# EAGLE board old_oven_pcb (EAGLE 9.4.2)
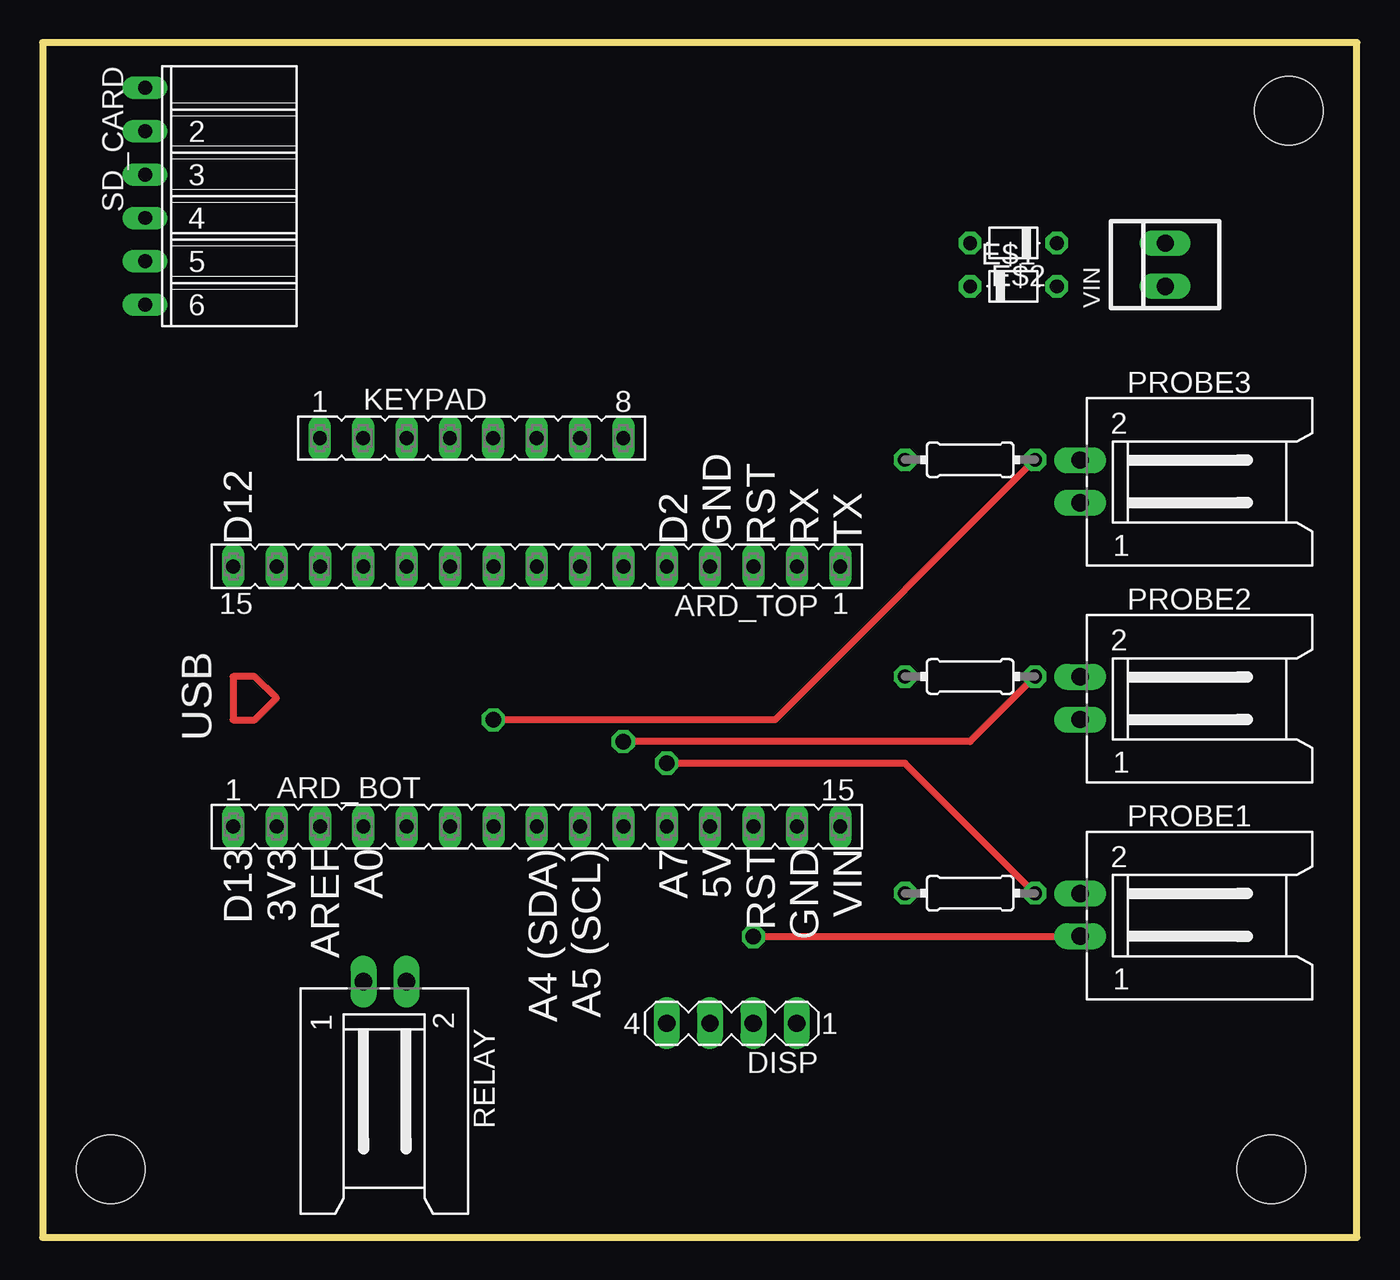
[diagram p0: board, top side]
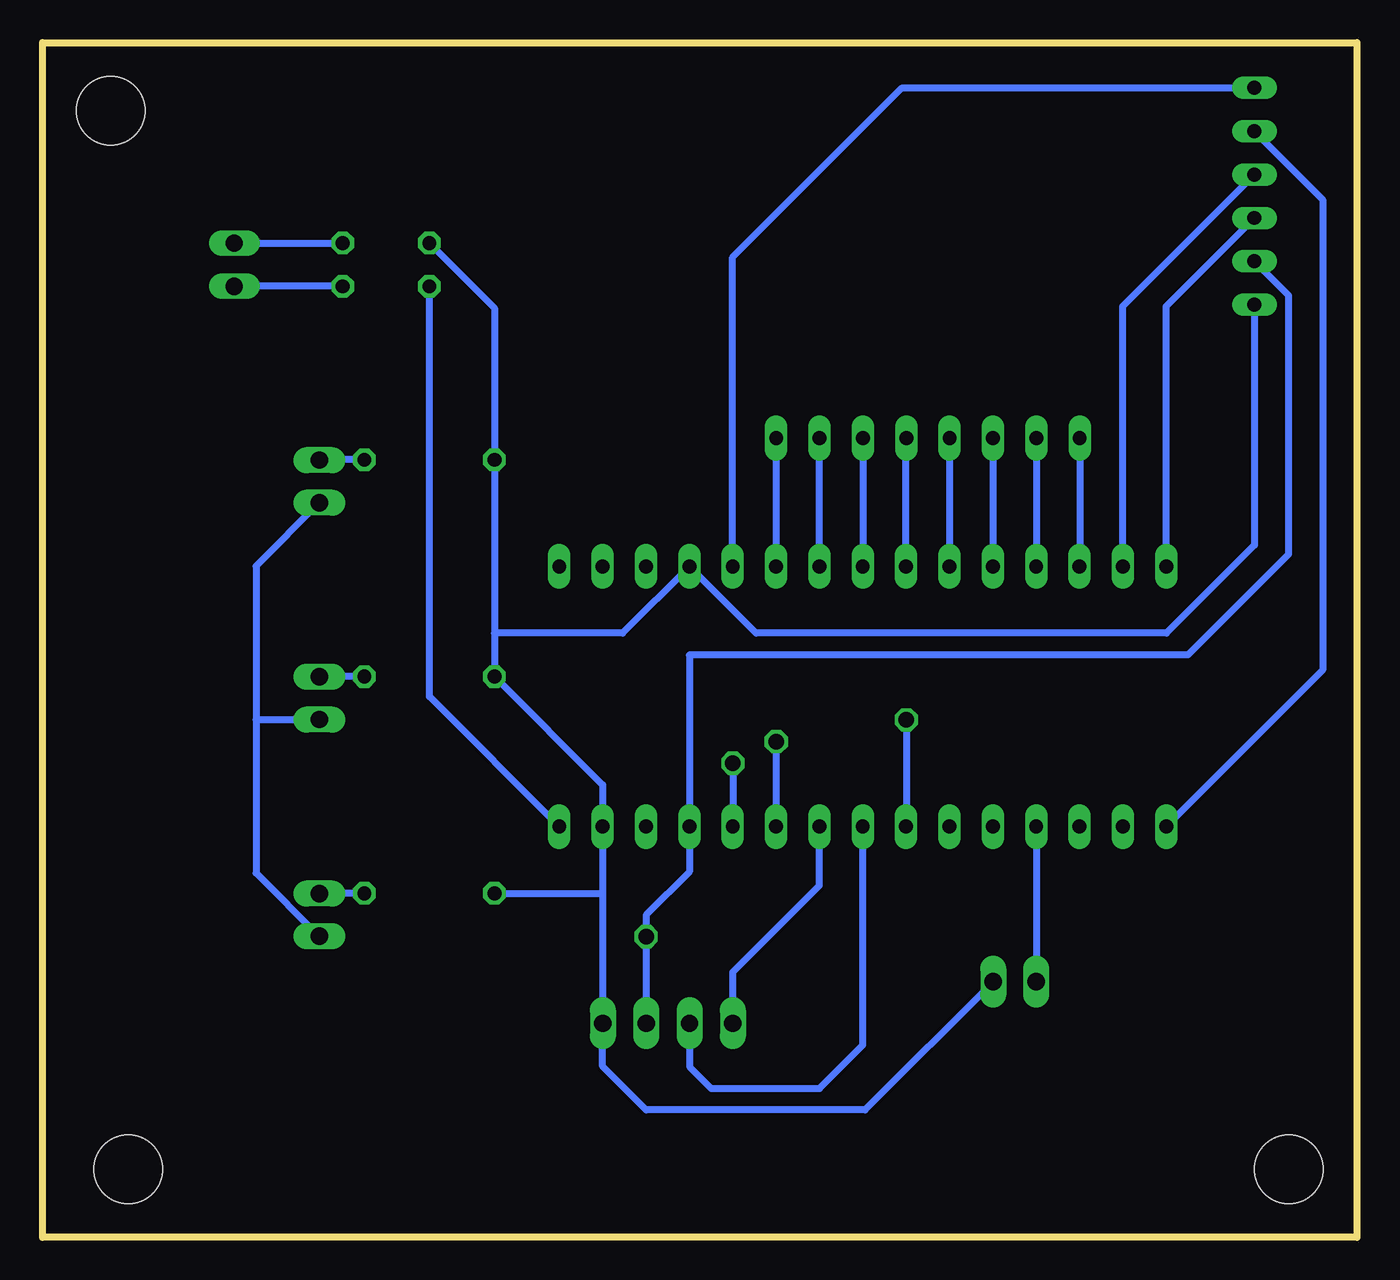
[diagram p1: board, bottom side, seen from below]

Size 77 x 70 mm. Coordinates in mm from the lower left corner, seen from the top.
Outline: 0,70 0,0 77,0 77,70 0,70
Copper layers (1*16): Top 0.035mm / dielectric 1.5mm / Bottom 0.035mm
Design rules "default": minimum track width 6mil, minimum drill 0.35mm, track to track 6mil, track to pad 6mil, pad to pad 6mil, via to via 6mil, smd to smd 6mil, copper to edge 40mil, drill to drill 6mil, minimum pad ring 10mil, minimum via ring 8mil, stop-mask expansion 4mil, vias tented up to drill 0mil, thermal gap 10mil
Holes 4 mm at 73,66 4,4 72,4

## Footprints (pad centres in the part's own frame; a part is rotated, then mirrored left to right if it is on the bottom)
FE15 = drill 0.813 long: 1 -17.78,0; 2 -15.24,0; 3 -12.7,0; 4 -10.16,0; 5 -7.62,0; 6 -5.08,0; 7 -2.54,0; 8 0,0; 9 2.54,0; 10 5.08,0; 11 7.62,0; 12 10.16,0; 13 12.7,0; 14 15.24,0; 15 17.78,0
MA04-1 = drill 1.016 long: 1 -3.81,0; 2 -1.27,0; 3 1.27,0; 4 3.81,0
D-5 = drill 0.813 octagon: A 2.54,0; C -2.54,0
0204/7 = drill 0.813 octagon: 1 -3.81,0; 2 3.81,0
FE08 = drill 0.813 long: 1 -8.89,0; 2 -6.35,0; 3 -3.81,0; 4 -1.27,0; 5 1.27,0; 6 3.81,0; 7 6.35,0; 8 8.89,0
L02P = drill 1.016 long: 1 1.25,-6.25; 2 -1.25,-6.25
FE06W = drill 0.813 long: 1 -6.35,0; 2 -3.81,0; 3 -1.27,0; 4 1.27,0; 5 3.81,0; 6 6.35,0
22-23-2021 = drill 1 long: 1 -1.27,0; 2 1.27,0

## Placement (x,y rotation side)
ARD_BOT  [FE15]  28.95,24.07 0 top
ARD_TOP  [FE15]  28.95,39.31 180 top
DISP  [MA04-1]  40.37,12.54 180 top
E$1  [D-5]  56.88,55.72 0 top
E$2  [D-5]  56.88,58.26 180 top
E$3  10k  [0204/7]  54.34,32.86 180 top
E$4  10k  [0204/7]  54.34,20.16 180 top
E$6  10k  [0204/7]  54.34,45.56 180 top
KEYPAD  [FE08]  25.13,46.83 0 top
PROBE1  [L02P]  67.04,18.89 270 top
PROBE2  [L02P]  67.04,31.59 270 top
PROBE3  [L02P]  67.04,44.29 270 top
RELAY  [L02P]  20.05,8.73 180 top
SD_CARD  [FE06W]  6,61 270 top
VIN  [22-23-2021]  65.77,56.99 90 top

## Library data of the parts
ARD_BOT ARD_TOP = con-lsta; OC_FARNELL: unknown; OC_NEWARK: unknown
DISP = con-lstb
E$1 E$2 = ref-packages
E$3 E$4 E$6 = rcl
KEYPAD SD_CARD = con-lsta
PROBE1-PROBE3 RELAY = con-amp-mt
VIN = con-molex

## Nets
5V: ARD_BOT.12 DISP.2 PROBE1.1 PROBE2.1 PROBE3.1 SD_CARD.5
BT_RX: ARD_TOP.2
D3: ARD_TOP.6 KEYPAD.8
D4: ARD_TOP.7 KEYPAD.7
D5: ARD_TOP.8 KEYPAD.6
D6: ARD_TOP.9 KEYPAD.5
D7: ARD_TOP.10 KEYPAD.4
D8: ARD_TOP.11 KEYPAD.3
D9: ARD_TOP.12 KEYPAD.2
D10: ARD_TOP.5 SD_CARD.1
D13: ARD_BOT.1 SD_CARD.2
GND: ARD_BOT.14 ARD_TOP.4 DISP.1 E$2.A E$3.2 E$4.2 E$6.2 RELAY.2 SD_CARD.6
PROBE1: ARD_BOT.11 E$4.1 PROBE1.2
PROBE2: ARD_BOT.10 E$3.1 PROBE2.2
PROBE3: ARD_BOT.7 E$6.1 PROBE3.2
RELAY: ARD_BOT.4 RELAY.1
S$1: ARD_TOP.13 KEYPAD.1
S$3: ARD_TOP.15 SD_CARD.4
S$4: ARD_TOP.14 SD_CARD.3
S$9: ARD_BOT.6
SCL: ARD_BOT.9 DISP.4
SDA: ARD_BOT.8 DISP.3
V+: E$1.A VIN.1
V-: E$2.C VIN.2
VIN: ARD_BOT.15 E$1.C

## Tracks (layer width: path | path; a pad name or v marks a point on that pad's centre or on a via)
5V  (via drill 0.9)
  Top 0.406: v41.64,17.62 60.77,17.62 PROBE1.1
  Bottom 0.406: PROBE3.1 64.5,39.33 64.5,30.32 | PROBE1.1 64.5,21.35 64.5,30.32 | PROBE2.1 60.81,30.32 64.5,30.32 | DISP.2 v41.64,17.62 41.64,18.89 39.11,21.42 ARD_BOT.12 39.11,34.12 39.1,34.13 9.89,34.13 4.01,40.01 4.01,55.2 SD_CARD.5
D3
  Bottom 0.406: KEYPAD.8 ARD_TOP.6 | 34.02,39.21 ARD_TOP.6 | ARD_TOP.6
D4
  Bottom 0.406: ARD_TOP.7 KEYPAD.7
D5
  Bottom 0.406: KEYPAD.6 28.94,39.21 28.95,39.22 ARD_TOP.8
D6
  Bottom 0.406: ARD_TOP.9 KEYPAD.5
D7
  Bottom 0.406: KEYPAD.4 ARD_TOP.10
D8
  Bottom 0.406: KEYPAD.3 ARD_TOP.11
D9
  Bottom 0.406: KEYPAD.2 ARD_TOP.12
D10
  Bottom 0.406: ARD_TOP.5 36.57,57.43 26.65,67.35 SD_CARD.1
D13
  Bottom 0.406: ARD_BOT.1 2.62,32.62 2.27,32.97 2,33.24 2,60.81 SD_CARD.2
GND
  Bottom 0.406: 44.19,20.16 ARD_BOT.14 44.19,26.52 E$3.2 50.53,35.4 | 44.19,20.16 DISP.1 | DISP.1 | RELAY.2 28.82,7.46 41.64,7.46 44.19,10.01 DISP.1 | E$4.2 44.19,20.16 | E$2.A 50.53,54.45 E$6.2 50.53,35.4 | 50.53,35.4 43.02,35.4 ARD_TOP.4 35.2,35.4 11.16,35.4 6,40.56 SD_CARD.6
PROBE1  (via drill 0.9)
  Top 0.406: E$4.1 50.53,27.78 v36.56,27.78
  Bottom 0.406: E$4.1 60.77,20.16 PROBE1.2 | v36.56,27.78 ARD_BOT.11
PROBE2  (via drill 0.9)
  Top 0.406: E$3.1 54.34,29.05 v34.02,29.05
  Bottom 0.406: E$3.1 60.77,32.86 PROBE2.2 | v34.02,29.05 ARD_BOT.10
PROBE3  (via drill 0.9)
  Top 0.406: E$6.1 42.91,30.32 v26.4,30.32
  Bottom 0.406: E$6.1 60.77,45.56 PROBE3.2 | v26.4,30.32 ARD_BOT.7
RELAY
  Bottom 0.406: ARD_BOT.4 RELAY.1
S$1
  Bottom 0.406: KEYPAD.1 ARD_TOP.13
S$3
  Bottom 0.406: ARD_TOP.15 11.17,54.56 SD_CARD.4
S$4
  Bottom 0.406: ARD_TOP.14 13.71,54.56 SD_CARD.3
S$22
  Top 0.406: 11.16,30.32 12.43,30.32 13.7,31.59 12.43,32.86 11.16,32.86 11.16,30.32
SCL
  Bottom 0.406: DISP.4 36.56,15.54 31.49,20.61 ARD_BOT.9
SDA
  Bottom 0.406: DISP.3 39.1,10 37.83,8.73 31.48,8.73 28.94,11.27 ARD_BOT.8
V+
  Bottom 0.406: E$1.A VIN.1
V-
  Bottom 0.406: VIN.2 E$2.C
VIN
  Bottom 0.406: ARD_BOT.15 54.34,31.68 E$1.C

## Text on the board
tNames: D12 / / / / / / / / / / D2 / GND / RST / RX / TX | USB | D13 / 3V3 / AREF / A0 / / / / A4 (SDA) / A5 (SCL) / / A7 / 5V / RST / GND / VIN